# Altium PCB BLE_povodok_hv2.PcbDoc
Units mm, origin at the board's own origin, x right, y up, seen from the top; angles counter-clockwise.
Board outline 35.8 x 35 mm, 2 copper layers (Top Layer, Bottom Layer); 39 components, 29 nets, 124 pads, 174 vias.
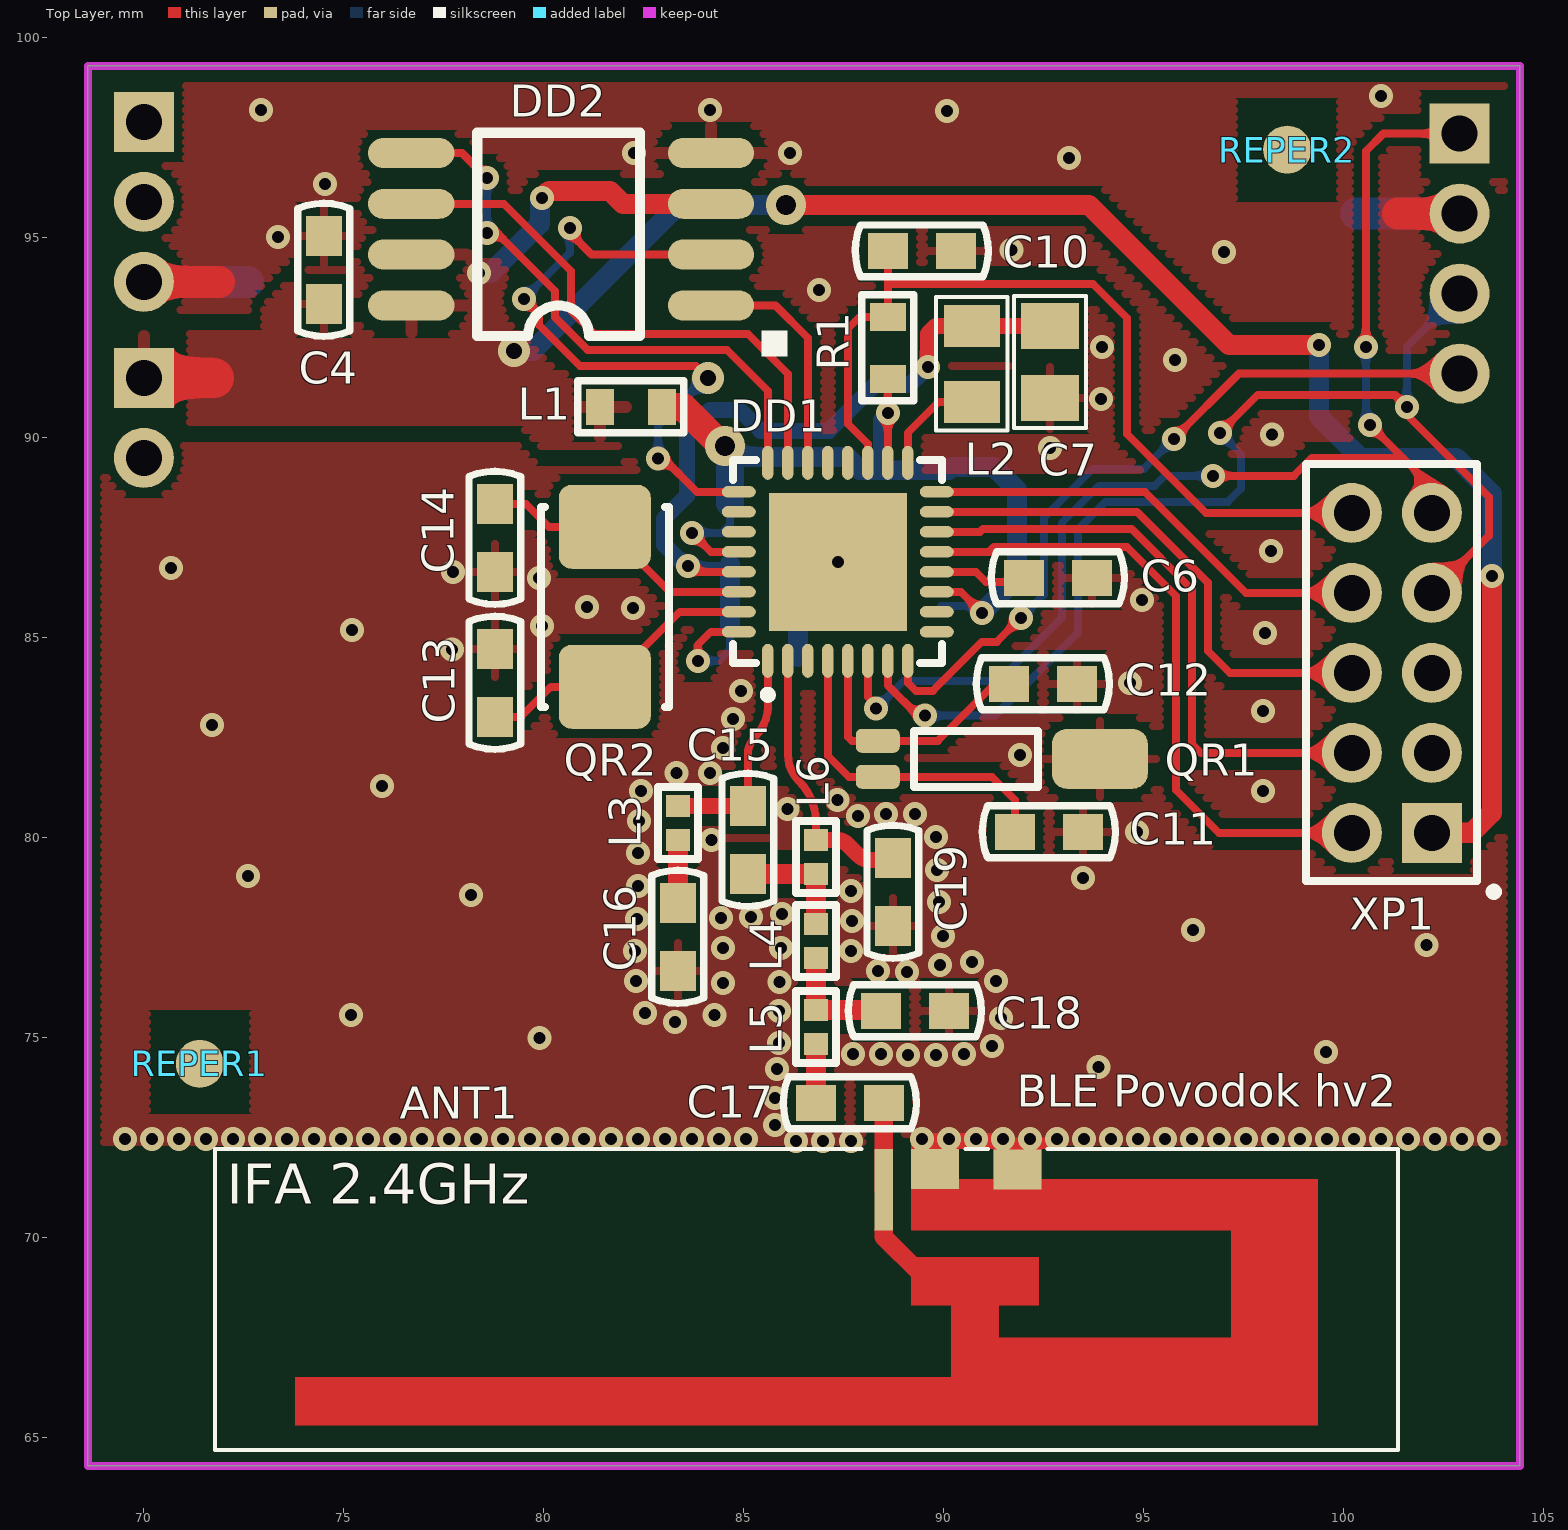
[diagram p0: Top Layer view]
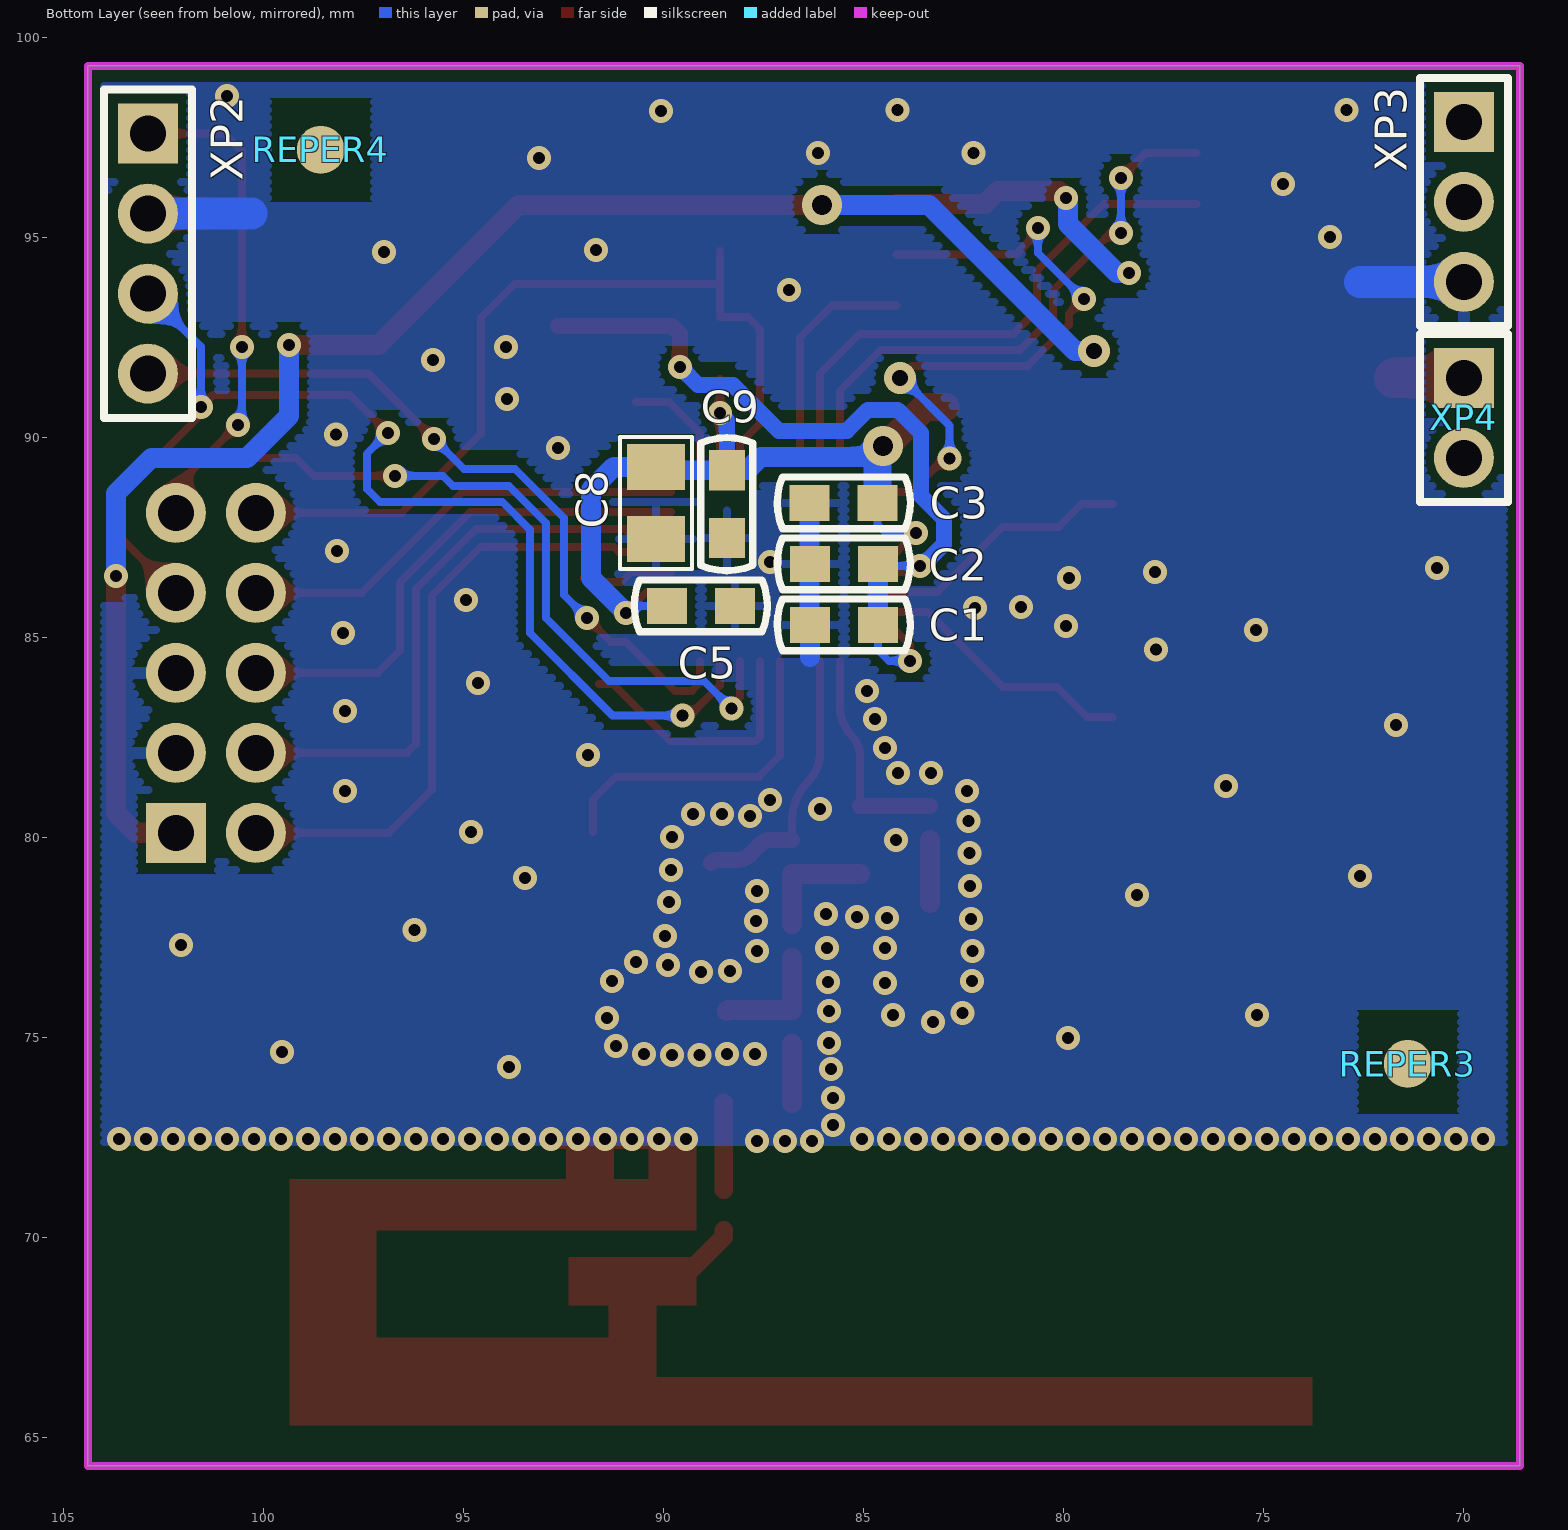
[diagram p1: Bottom Layer view, seen from below]
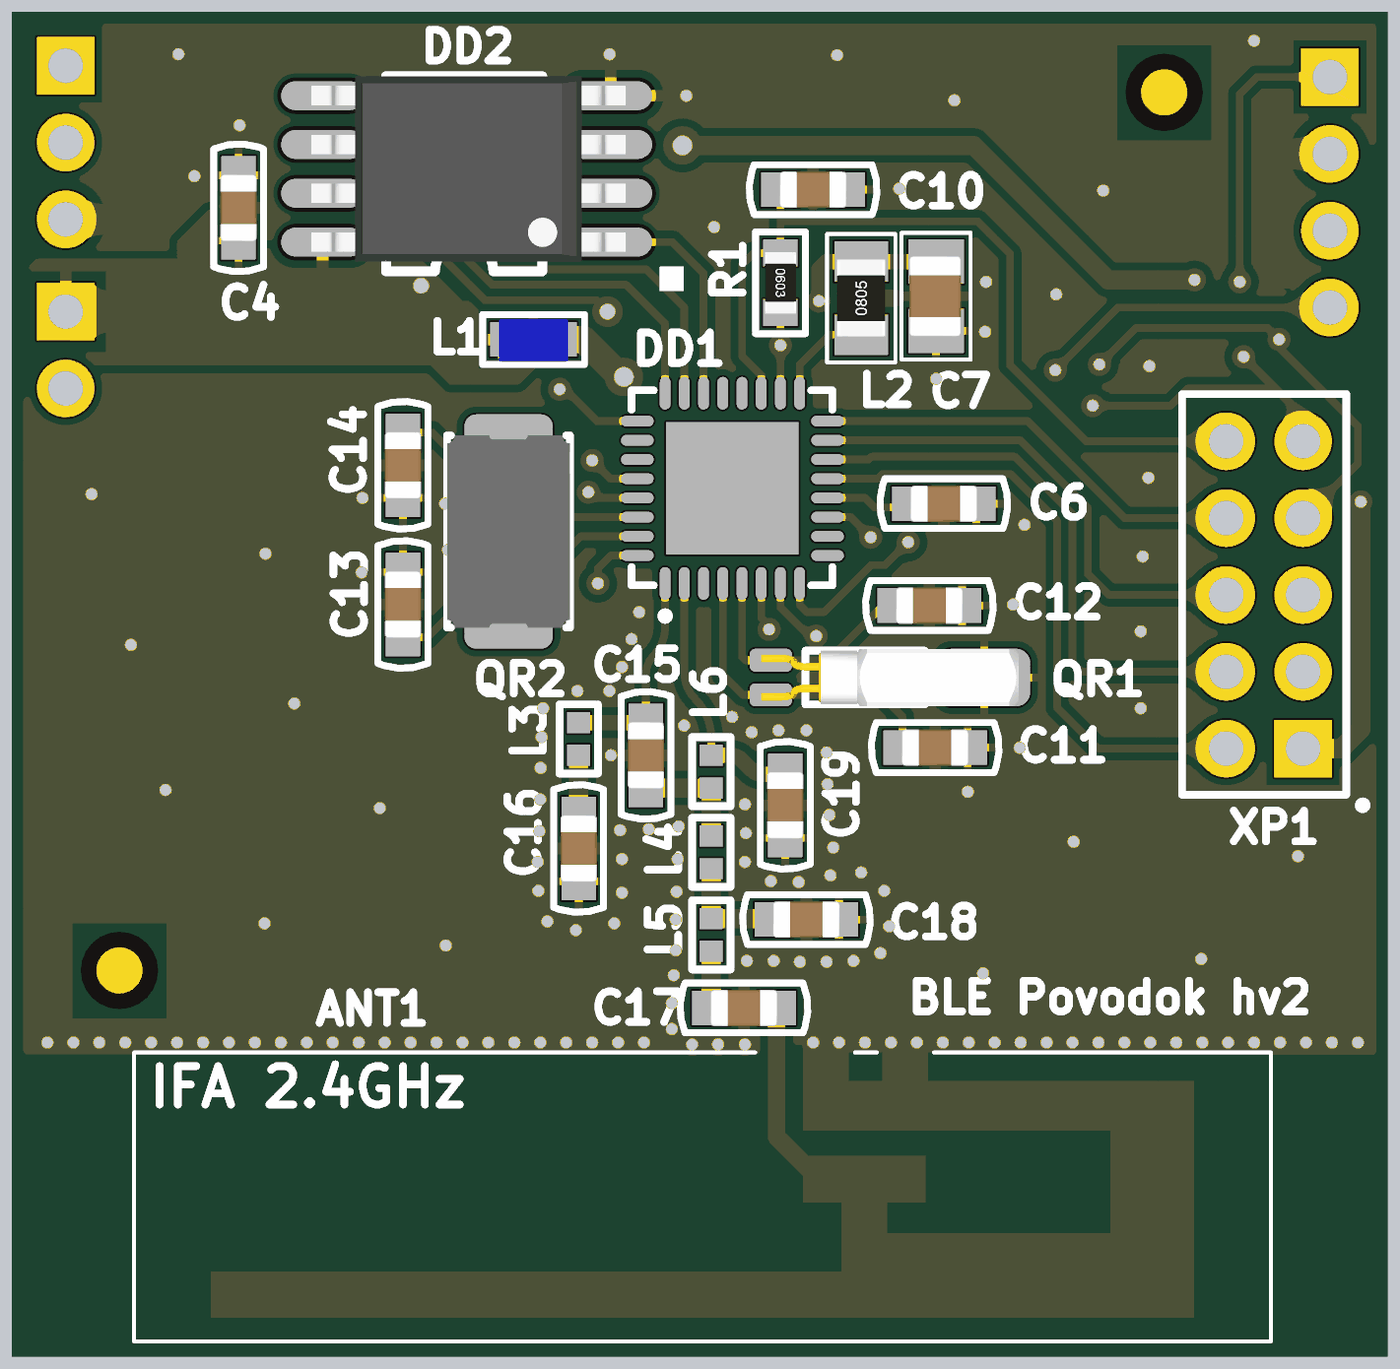
[diagram p2: 3D render of the assembled board from above, using the file's embedded part models]
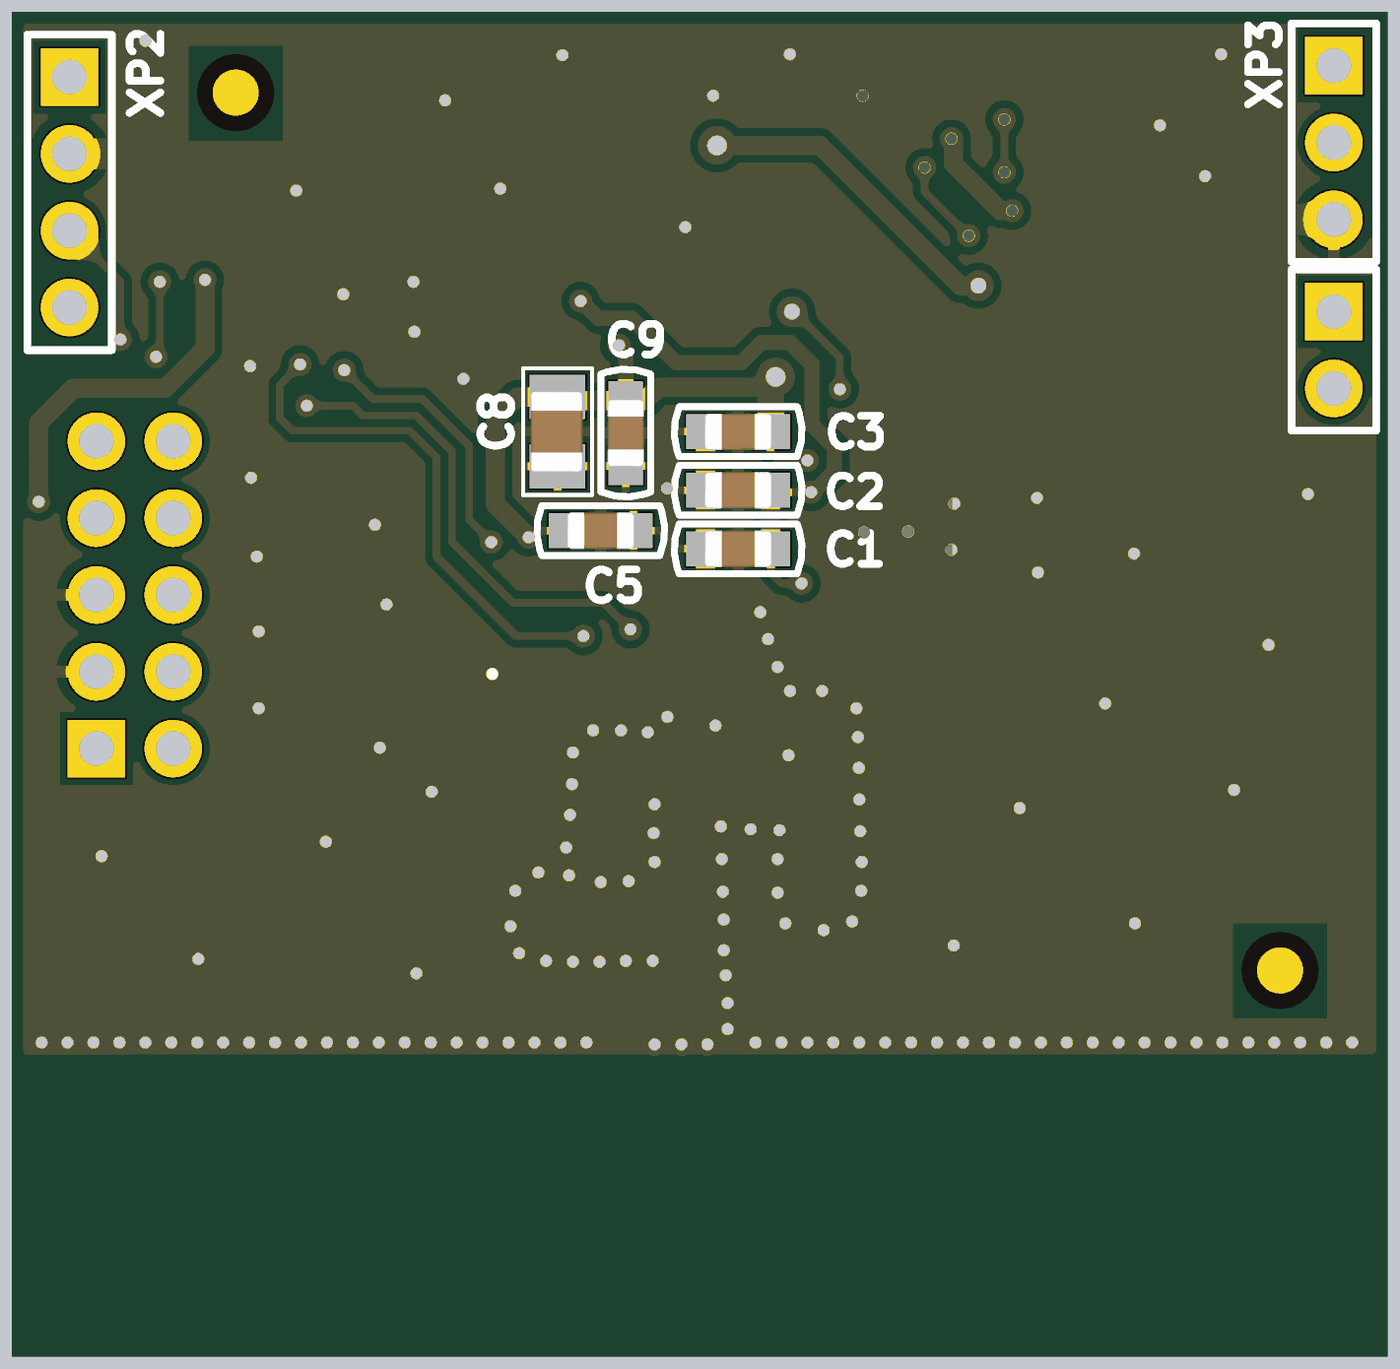
[diagram p3: 3D render of the assembled board from below, using the file's embedded part models]

## Layer stack, top to bottom
Top Solder: solder mask 0.0102, Solder Resist, Dk 3.5
Top Layer: signal copper 0.0356
Dielectric 1: dielectric 0.32, FR-4, Dk 4.8
Bottom Layer: signal copper 0.0356
Bottom Solder: solder mask 0.0102, Solder Resist, Dk 3.5

## Board outline
68.6,64.3 104.4,64.3 104.4,99.3 68.6,99.3

## Design rules (kind name [scope] priority, off if disabled: settings)
Clearance [All] p1: gap=0.2 ignorepadtopadclearanceinfootprint=FALSE
ComponentClearance [All] p1: gap=0.05 collisioncheckmode=3 verticalgap=2540 showdistances=FALSE
HoleSize [All] p1: absolutevalues=TRUE maxlimit=10 minlimit=0.025 maxpercent=80.000 minpercent=20.000
HoleToHoleClearance [All] p1: gap=0.1 allowstackedmicrovias=TRUE
MinimumSolderMaskSliver [All] p1: minsoldermaskwidth=0.05
PolygonConnect POWER [InComponent('XP4') OR InComponent('DD2') OR InComponent('L1')] p1: connectstyle=Relief reliefconductorwidth=0.3 reliefentries=4 polygonreliefangle="90 Angle" airgapwidth=0.3
PolygonConnect VIA [IsVia] p2: connectstyle=Direct reliefconductorwidth=0.254 reliefentries=4 polygonreliefangle="90 Angle" airgapwidth=0.254
PolygonConnect [All] p3: thpad.connectstyle=Relief thpad.reliefconductorwidth=0.3 thpad.reliefentries=4 thpad.polygonreliefangle="90 Angle" thpad.airgapwidth=0.3 smdpad.connectstyle=Relief smdpad.reliefconductorwidth=0.2 smdpad.reliefentries=4 smdpad.polygonreliefangle="90 Angle" smdpad.airgapwidth=0.2 via.connectstyle=Direct via.reliefconductorwidth=0.3 via.reliefentries=4 via.polygonreliefangle="90 Angle" via.airgapwidth=0.3
RoutingVias [All] p1: holewidth=0.4 width=0.4 viastyle="Through Hole" minholewidth=0.3 minwidth=0.6 maxholewidth=0.5 maxwidth=1
ShortCircuit Antenna [InComponent('ANT1')] p1: allowed=TRUE
ShortCircuit [All] p2: allowed=FALSE
SilkToSilkClearance [All] p1: silktosilkclearance=0.05
SilkToSolderMaskClearance [IsPad] p1: minsilkscreentomaskgap=0.05 clearancetoexposedcopper=TRUE
SolderMaskExpansion [All] p1: expansion=0.102
Width [All] p1: maxlimit=1 minlimit=0.2 preferedwidth=0.5
23 further rules are at their usual default settings.

## Classes and differential pairs
component class [3]-MCU: C1 C2 C3 C4 C5 C6 C7 C8 C9 C10 C11 C12 C13 C14 DD1 DD2 L1 L2 QR1 QR2 R1
component class [4]-RF: ANT1 C15 C16 C17 C18 C19 L3 L4 L5 L6 REPER1 REPER2 REPER3 REPER4
component class [5]-CONNECTORS: XP1 XP2 XP3 XP4

## Components (designator, comment, footprint, x,y, rotation, side; value= is the part's Value field where it differs from the comment)
ANT1 "IFA_TI_2.4G_Reference" ANT_IFA_2.4G_BEST 88.497,72.137 r180 top
C1 "0.1uF" CC0603 85.5,85.325 r0 bottom
C2 "0.1uF" CC0603 85.5,86.851 r0 bottom
C3 "0.1uF" CC0603 85.502,88.375 r180 bottom
C4 "0.1uF" CC0603 74.5,94.2 r90 top
C5 "0.1uF" CC0603 89.075,85.8 r0 bottom
C6 "1uF" CC0603 92.85,86.5 r0 top
C7 "10uF" CC0805 92.65,91.9 r90 top
C8 "10uF" CC0805 90.2,88.375 r90 bottom
C9 "0.1uF" CC0603 88.425,88.339 r90 bottom
C10 "0.1uF" CC0603 89.45,94.675 r180 top
C11 "15pF" CC0603 92.625,80.15 r0 top
C12 "15pF" CC0603 92.475,83.85 r0 top
C13 "22pF" CC0603 78.777,83.875 r90 top
C14 "22pF" CC0603 78.775,87.5 r270 top
C15 "1pF" CC0603 85.1,79.95 r270 top
C16 "6.8pF" CC0603 83.35,77.525 r90 top
C17 "12pF" CC0603 87.65,73.375 r0 top
C18 "1pF" CC0603 89.275,75.675 r0 top
C19 "1pF" CC0603 88.725,78.65 r270 top
DD1 "CC2650" QFN32_TI 85.6,84.425 r90 top
DD2 "IS25LP016D-JBLE" EIAJ_SO8 84.18,93.31 r180 top
L1 "BLM18HE152SN1" L0603 82.175,90.775 r0 top
L2 "10uH" RC0805 90.7,91.85 r90 top
L3 "2.4nH" L0402 83.35,80.375 r90 top
L4 "2nH" L0402 86.8,77.425 r270 top
L5 "2nH" L0402 86.8,75.275 r270 top
L6 "2.4nH" L0402 86.8,79.525 r270 top
QR1 "MS3V-T1R" MS3V-T1R 88.35,82.425 r0 top
QR2 "SJK-6L-24.0" AC5032_2 81.525,85.775 r90 top
R1 "100k" RC0603 88.6,92.25 r270 top
REPER1 "REPER1.2" REPER1.2#1 71.4,74.35 r90 top
REPER2 "REPER1.2" REPER1.2#1 98.584,97.206 r90 top
REPER3 "REPER1.2" REPER1.2#2 71.4,74.35 r90 bottom
REPER4 "REPER1.2" REPER1.2#2 98.575,97.2 r90 bottom
XP1 "PLD2-10" PLD2-10 102.175,80.125 r180 top
XP2 "PBS2-04" PLS2-04 102.896,97.6 r270 bottom
XP3 "PBS2-03" PLS2-03 70,97.9 r270 bottom
XP4 "PBS2-02" PLS2-02 70,91.5 r270 bottom

## Footprints (in the part's own frame and the unit in brackets; to place one, negate y for a bottom-side part, rotate by r counter-clockwise, add the part's x,y. Pads: shape width x height; smd on the part's side, far side on the other; paste and mask are expansions set on the pad)
AC5032_2 [mm]
  rrect30% 2.1x2.3 smd mask+0.05: 1(-2,0) 2(2,0)
  silkscreen extent -2.5,-1.6 2.5,1.6, body extent -2.5,-1.6 2.5,1.6, height 1.2
ANT_IFA_2.4G_BEST [mm]
  rect 0.46x2.03 smd paste-10 mask+0.05: 1(-0.003,0.937)
  rect 1.2x1 smd paste-10 mask+0.05: 2(-3.35,0.43) 2(-1.285,0.423)
  Top Layer region: -3.883,2.615 -0.683,2.615 -0.683,3.825 -3.883,3.825
  Top Layer region: -8.683,4.624 -1.684,4.624 -1.684,5.624 -8.683,5.624
  Top Layer region: -10.864,0.662 -0.684,0.662 -0.684,1.952 -10.864,1.952
  Top Layer region: -1.884,-0.078 -0.684,-0.078 -0.684,1.952 -1.884,1.952
  Top Layer region: -3.949,-0.078 -2.749,-0.078 -2.749,1.952 -3.949,1.952
  Top Layer region: -10.864,0.662 -8.683,0.662 -8.683,6.832 -10.864,6.832
  Top Layer region: -10.864,5.623 14.716,5.623 14.716,6.832 -10.864,6.832
  Top Layer region: -2.883,3.825 -1.684,3.825 -1.684,4.625 -2.883,4.625
  Top Layer pour cut-out: -12.914,7.493 -12.914,-0.132 16.769,-0.132 16.769,7.493
  Top Layer lines w0.46: -0.003,1.952 -0.003,2.118 -0.931,3.046
  Bottom Layer pour cut-out: -12.914,7.493 -12.914,-0.132 16.769,-0.132 16.769,7.493
  silkscreen extent -12.86,-0.08 16.72,7.44
CC0603 [mm]
  rect 1x0.9 smd paste-25.4 mask+0.05: 1(-0.85,0) 2(0.85,0)
  silkscreen extent -1.66,-0.65 1.66,0.65, body extent -0.87,-0.47 0.88,0.48, height 0.85
CC0805 [mm]
  rect 1.15x1.45 smd paste-25.4 mask+0.05: 1(-0.9,0) 2(0.9,0)
  silkscreen extent -1.65,-0.9 1.65,0.9, body extent -1.05,-0.65 1.05,0.7, height 1.1
EIAJ_SO8 [mil]
  oval 85x29.53 smd: 1(0,0) 2(0,-50) 3(0,-100) 4(0,-150) 5(295,-150) 6(295,-100) 7(295,-50) 8(295,0)
  silkscreen extent -75,-170 230,50, body extent -15,-170 307,20, height 67
L0402 [mm]
  rect 0.55x0.6 smd mask+0.05: 1(-0.425,0) 2(0.425,0)
  silkscreen extent -0.9,-0.5 0.9,0.5
L0603 [mm]
  rect 0.7x0.9 smd paste-25.4 mask+0.05: 1(-0.775,0) 2(0.774,0)
  silkscreen extent -1.32,-0.65 1.33,0.65, body extent -0.9,-0.58 0.9,0.54, height 1
MS3V-T1R [mm]
  rrect50% 1.1x0.6 smd mask+0.05: 1(0,0) 2(0,-0.9)
  rrect50% 2.4x1.5 smd mask+0.05: 3(5.55,-0.45)
  silkscreen extent 0.9,-1.15 4,0.25, body extent -0.25,-1.19 6.45,0.29, height 1.48
PLD2-10 [mm]
  rect 1.5x1.5 hole 0.9 mask+0.05: 1(-0.025,0)
  round 1.5 hole 0.9 mask+0.05: 2(1.975,0) 3(-0.025,-2) 4(1.975,-2) 5(-0.025,-4) 6(1.975,-4) 7(-0.025,-6) 8(1.975,-6) 9(-0.025,-8) 10(1.975,-8)
  silkscreen extent -1.15,-9.23 3.13,1.2
PLS2-02 [mm]
  rect 1.5x1.5 hole 0.9 mask+0.05: 1(0,0)
  round 1.5 hole 0.9 mask+0.05: 2(2,0)
  silkscreen extent -1.1,-1.1 3.1,1.1
PLS2-03 [mm]
  rect 1.5x1.5 hole 0.9 mask+0.05: 1(0,0)
  round 1.5 hole 0.9 mask+0.05: 2(2,0) 3(4,0)
  silkscreen extent -1.1,-1.1 5.1,1.1
PLS2-04 [mm]
  rect 1.5x1.5 hole 0.9 mask+0.05: 1(-0.006,-0.002)
  round 1.5 hole 0.9 mask+0.05: 2(1.994,-0.002) 3(3.994,-0.002) 4(5.994,-0.002)
  silkscreen extent -1.11,-1.1 7.1,1.1
QFN32_TI [mm]
  oval 0.85x0.28 smd mask+0.05: 1(0,0) 2(0,-0.5) 3(0,-1) 4(0,-1.5) 5(0,-2) 6(0,-2.5) 7(0,-3) 8(0,-3.5) 17(4.95,-3.5) 18(4.95,-3) 19(4.95,-2.5) 20(4.95,-2) 21(4.95,-1.5) 22(4.95,-1) 23(4.95,-0.5) 24(4.95,0)
  oval 0.28x0.85 smd mask+0.05: 9(0.725,-4.225) 10(1.225,-4.225) 11(1.725,-4.225) 12(2.225,-4.225) 13(2.725,-4.225) 14(3.225,-4.225) 15(3.725,-4.225) 16(4.225,-4.225) 25(4.225,0.725) 26(3.725,0.725) 27(3.225,0.725) 28(2.725,0.725) 29(2.225,0.725) 30(1.725,0.725) 31(1.225,0.725) 32(0.725,0.725)
  rect 3.45x3.45 smd mask+0.05: 33(2.475,-1.75)
  silkscreen extent -0.95,-4.35 5.02,0.87
RC0603 [mm]
  rect 0.7x0.9 smd paste-25.4 mask+0.05: 1(-0.775,0) 2(0.774,0)
  silkscreen extent -1.32,-0.65 1.33,0.65, body extent -0.8,-0.4 0.8,0.4, height 0.45
RC0805 [mm]
  rect 1.05x1.4 smd paste-25.4 mask+0.05: 1(-0.95,0) 2(0.95,0)
  silkscreen extent -1.67,-0.89 1.67,0.89, body extent -1,-0.62 1,0.63, height 0.6
REPER1.2#1 [mm]
  round 1.2 smd paste-25.4 mask+0.05: 1(0,0)
  Top Layer pour cut-out: -1.35,-1.325 1.325,-1.325 1.325,1.325 -1.35,1.325
REPER1.2#2 [mm]
  round 1.2 smd paste-25.4 mask-25.4: 1(0,0)
  Top Layer pour cut-out: -1.35,-1.325 1.325,-1.325 1.325,1.325 -1.35,1.325

## Part data
ANT1: library part ANT_WiFi_IFA_BEST
C1 C2 C3 C4 C5 C6 C9 C10 C11 C12 C13 C14 C15 C16 C17 C18 C19: library part CC0603, "CC0603"
C7 C8: library part CC0805, "CC0805"
DD1: library part CC2650RHB, "CC2650RHBT"
DD2: library part S25FL016A0LMFI01, "S25FL016A0LMFI01"
L1: library part L0603, "L0603"
L2: library part L0805, "L0805"
L3 L4 L5 L6: library part L0402, "L0402"
QR1: "CRYSTAL_32768 Hz"
QR2: library part AC5032_2, "AC5032/2"
R1: library part RC0603, "RC0603"
XP2: library part PLS2-04, "PLS2-04"
XP3: library part PLS2-03
XP4: library part PLS2-02

## Via types
v1: diameter 0.6, hole 0.3, Top Layer to Bottom Layer, tented both sides, 170 vias
v2: diameter 1, hole 0.5, Top Layer to Bottom Layer, tented both sides, 2 vias
v3: diameter 0.8, hole 0.4, Top Layer to Bottom Layer, tented both sides, 2 vias

## Nets (pads, with @x,y where several pads share a name; then routed paths per layer and width w, separated by ;. In a path a pad name is that pad's centre, name@x,y a point inside that pad or via, vN(x,y) a via of type N, cw(c..) or ccw(c..) an arc to the next point about the centre after c; other vN are vias at no path point)
+3V: C4.1 DD2.3 DD2.7 DD2.8 L1.1 XP1.1 XP4.1 | length 48.6
  Top Layer w0.5: v1(79.95,96) 80.125,96.175 81.65,96.175 81.975,95.85 DD2.3 ; v2(86.05,95.825) 93.625,95.825 97.125,92.325 v1(99.375,92.325) ; XP1.1 103.2,80.125 103.7,80.625 v1(103.7,86.55)
  Top Layer w1: XP4.1 71.75,91.5
  Bottom Layer w0.5: v1(78.375,94.125) 78.675,94.125 79.9,95.35 79.9,95.95 v1(79.95,96) ; v3(79.25,92.175) 79.725,92.175 83.375,95.825 v2(86.05,95.825) ; v1(99.375,92.325) 99.375,90.539 100.414,89.5 102.809,89.5 103.7,88.609 v1(103.7,86.55)
+3V_F: C3.2 C5.2 C8.2 C9.2 DD1.11 DD1.18 DD1.28 L1.2 R1.2 | length 23.6
  Top Layer w0.2: v1(83.7,87.625) 84.175,87.15 DD1.28 ; DD1.18 R1.2 ; DD1.11 90.425,86.15 v1(90.95,85.625)
  Top Layer w0.7: L1.2 83.475,90.775 84.45,89.8 v2(84.525,89.8)
  Bottom Layer w0.2: v1(83.7,87.625) 84.45,87.625 84.652,87.827 C3.2 ; C5.2 90.775,85.8 v1(90.95,85.625)
  Bottom Layer w0.4: C9.2 88.425,90.45 v1(88.6,90.625)
  Bottom Layer w0.5: v2@84.525,89.725 v2(84.525,89.8) 84.652,89.673 84.8,89.525 87.575,89.525 87.911,89.189 C9.2 90.114,89.189 C8.2 91.25,89.275 91.825,88.7 91.825,86.5 v1(90.95,85.625)
  Bottom Layer w0.7: C3.2 v2@84.652,89.673
BT_MRDO: DD1.8 XP2.4 | length 18.8
  Top Layer w0.2: DD1.8 89.1,83.875 89.3,83.675 89.725,83.675 90.95,84.9 91.325,84.9 v1(91.925,85.5) ; v1(95.75,89.975) 97.381,91.606 XP2.4
  Bottom Layer w0.2: v1(91.925,85.5) 92.5,86.075 92.5,88 93.725,89.225 95,89.225 v1(95.75,89.975)
BT_RX: DD1.7 XP1.7 XP2.3 | length 29.9
  Top Layer w0.2: DD1.7 88.6,83.809 89.355,83.054 v1(89.529,83.054) ; v1(96.9,90.125) 97.85,91.075 101.275,91.075 v1(101.575,90.775) 101.575,90.575 103.625,88.525 103.625,87.55 XP1.7
  Bottom Layer w0.2: v1@89.529,83.104 v1(89.529,83.054) 91.279,83.054 93.35,85.125 93.35,87.709 94.041,88.4 97.1,88.4 97.425,88.725 97.425,89.6 v1(96.9,90.125) ; v1(101.575,90.775) 101.575,92.283 XP2.3
BT_TX: DD1.6 XP1.9 XP2.1 | length 30.7
  Top Layer w0.2: DD1.6 88.1,83.524 88.304,83.32 v1(88.304,83.229) ; v1(96.725,89.05) 98.75,89.05 99.2,89.5 101.475,89.5 ; v1(100.55,92.275) 100.55,97.166 100.99,97.606 XP2.1 ; v1(100.65,90.325) 101.475,89.5 ; XP1.9 102.2,88.775 101.475,89.5
  Bottom Layer w0.2: v1(88.304,83.229) 89,83.925 91.375,83.925 92.95,85.5 92.95,87.875 93.875,88.8 95.275,88.8 95.525,89.05 v1(96.725,89.05) ; v1(100.55,92.275) 100.55,90.425 v1(100.65,90.325)
GND: ANT1.2 C1.2 C2.2 C3.1 C4.2 C5.1 C6.2 C7.1 C8.1 C9.1 C10.1 C11.2 C12.2 C13.2 C14.2 C16.1 C18.2 C19.2 DD1.33 DD2.4 QR1.3 XP1.3 XP1.5 XP2.2 XP3.3 | length 12.5
  Top Layer w0.8: XP3.3 71.875,93.9 ; 101.355,95.606 XP2.2
  Bottom Layer w0.5: 86.35,84.525 C1.2 86.352,85.327 C3.1
  Bottom Layer w0.8: XP3.3 72.6,93.9 ; 100.306,95.606 XP2.2
  other v1: 86.3,72.425 86.975,72.425 87.675,72.425 69.525,72.475 70.2,72.475 70.875,72.475 71.55,72.475 72.225,72.475 72.9,72.475 73.575,72.475 74.25,72.475 74.925,72.475 75.6,72.475 76.275,72.475 76.95,72.475 77.625,72.475 78.3,72.475 78.975,72.475 79.65,72.475 80.325,72.475 81,72.475 81.675,72.475 82.35,72.475 83.025,72.475 83.7,72.475 84.375,72.475 85.05,72.475 89.45,72.475 90.125,72.475 90.8,72.475 91.475,72.475 92.15,72.475 92.825,72.475 93.5,72.475 94.175,72.475 94.85,72.475 95.525,72.475 96.2,72.475 96.875,72.475 97.55,72.475 98.225,72.475 98.9,72.475 99.575,72.475 100.25,72.475 100.925,72.475 101.6,72.475 102.275,72.475 102.95,72.475 103.625,72.475 85.775,72.825 85.775,73.5 85.825,74.225 93.872,74.275 89.106,74.575 89.8,74.575 87.725,74.6 88.425,74.6 90.5,74.6 99.55,74.65 91.2,74.8 85.875,74.875 79.892,75 83.276,75.4 91.425,75.5 75.175,75.575 84.273,75.575 82.534,75.625 85.875,75.675 84.475,76.375 85.897,76.4 82.3,76.425 91.3,76.425 89.075,76.65 88.35,76.675 89.9,76.825 90.7,76.9 82.285,77.175 87.675,77.175 84.475,77.25 85.925,77.25 102.066,77.325 89.975,77.55 96.228,77.7 87.7,77.925 82.325,77.975 84.425,78 85.175,78.025 85.95,78.1 89.875,78.4 78.175,78.575 87.675,78.675 82.35,78.8 93.475,79 72.6,79.05 89.825,79.2 82.36,79.625 84.19,79.95 89.8,80.025 94.825,80.147 82.384,80.425 87.851,80.55 88.55,80.6 89.275,80.6 86.092,80.725 87.342,80.95 82.425,81.175 97.975,81.175 75.95,81.3 83.316,81.625 84.15,81.625 91.9,82.067 84.475,82.25 71.7,82.825 84.725,82.975 97.975,83.175 84.925,83.675 94.65,83.875 77.7,84.71 98.025,85.125 75.2,85.2 79.95,85.3 82.225,85.75 81.075,85.775 94.95,85.95 79.875,86.5 77.725,86.65 70.675,86.75 87.35,86.9 98.175,87.175 92.65,89.75 98.2,90.081 93.925,90.975 95.775,91.95 93.95,92.275 86.875,93.7 96.999,94.65 91.691,94.7 73.35,95.025 74.525,96.35 93.125,97 82.259,97.12 86.15,97.12 90.075,98.175 72.934,98.2 84.155,98.2 100.925,98.55
JTAG_TCK: DD1.14 XP1.4 | length 15
  Top Layer w0.2: DD1.14 90.9,87.65 90.975,87.725 94.691,87.725 96.2,86.216 96.2,82.35 96.425,82.125 XP1.4
JTAG_TDI: DD1.16 XP1.8 | length 11.4
  Top Layer w0.2: DD1.16 95.025,88.65 97.55,86.125 XP1.8
JTAG_TDO: DD1.15 XP1.6 | length 13
  Top Layer w0.2: DD1.15 94.831,88.15 96.6,86.381 96.6,84.675 97.15,84.125 XP1.6
JTAG_TMS: DD1.13 XP1.2 | length 16.2
  Top Layer w0.2: DD1.13 91.125,87.15 91.25,87.275 94.575,87.275 95.8,86.05 95.8,81.2 96.875,80.125 XP1.2
MISO: DD1.25 DD2.2 | length 16.5
  Top Layer w0.2: v1(79.5,93.475) 79.875,93.1 79.875,92.825 80.9,91.8 83.8,91.8 v3(84.1,91.5) ; v1(80.65,95.25) 80.65,95.125 81.195,94.58 DD2.2 ; v1(82.854,89.479) 82.996,89.479 83.825,88.65 DD1.25
  Bottom Layer w0.2: v1(79.5,93.475) 80.65,94.625 v1(80.65,95.25) ; v1(82.854,89.479) 82.858,89.475 82.858,90.308 v3@84,91.45
MOSI: DD1.24 DD2.5 | length 14.4
  Top Layer w0.2: DD2.5 77.955,97.12 v1(78.575,96.5) ; v1(78.575,95.125) 78.825,95.125 80.275,93.675 80.275,93.019 81.094,92.2 84.575,92.2 85.6,91.175 DD1.24
  Bottom Layer w0.2: v1(78.575,95.125) v1(78.575,96.5)
NetANT1_1: ANT1.1 C17.2 | length 2.2
  Top Layer w0.46: ANT1.1 C17.2
NetC1_1: C1.1 C2.1 C7.2 DD1.29 DD1.32 L2.2 | length 22
  Top Layer w0.2: v1(83.6,86.8) 83.75,86.65 DD1.29 ; v1(83.85,84.425) 83.85,84.825 84.175,85.15 DD1.32
  Top Layer w0.4: v1(89.6,91.775) 89.6,92.6 89.8,92.8 L2.2 C7.2
  Bottom Layer w0.2: v1(83.6,86.8) 84.599,86.8 C2.1 ; v1(83.85,84.425) 84.375,84.425 84.65,84.7 C1.1
  Bottom Layer w0.4: v1(83.6,86.8) 83.535,86.8 83,87.335 83,87.975 83.575,88.55 83.575,90.123 84.152,90.7 84.898,90.7 85.423,90.175 87.125,90.175 88.275,91.325 89.15,91.325 v1(89.6,91.775)
  Bottom Layer w0.5: C1.1 C2.1
NetC6_1: C6.1 DD1.12 | length 2.3
  Top Layer w0.2: DD1.12 90.8,86.65 91.05,86.4 91.9,86.4 C6.1
NetC13_1: C13.1 DD1.31 QR2.1 | length 7.2
  Top Layer w0.2: C13.1 79.425,83.025 80.175,83.775 QR2.1 83.4,85.65 DD1.31
NetC14_1: C14.1 DD1.30 QR2.2 | length 7
  Top Layer w0.2: C14.1 79.55,88.35 80.125,87.775 QR2.2 83.15,86.15 DD1.30
NetC15_2: C15.2 L4.1 L6.2 | length 3
  Top Layer w0.5: C15.2 L6.2 L4.1
NetC16_2: C16.2 L3.1 | length 1.6
  Top Layer w0.5: C16.2 L3.1
NetC17_1: C17.1 L5.2 | length 1.5
  Top Layer w0.5: C17.1 L5.2
NetC18_1: C18.1 L4.2 L5.1 | length 2.9
  Top Layer w0.5: L4.2 L5.1 88.4,75.7 C18.1
NetDD1_17: DD1.17 L2.1 | length 2.7
  Top Layer w0.2: DD1.17 89.1,90.125 89.875,90.9 L2.1
RESET: C10.2 DD1.19 R1.1 XP1.10 | length 22
  Top Layer w0.2: DD1.19 88.1,89.85 87.6,90.35 87.6,92.725 87.9,93.025 R1.1 88.6,93.85 ; C10.2 88.6,93.85 ; XP1.10 96.55,88.125 94.575,90.1 94.575,93 93.725,93.85 88.6,93.85
RF_N: C19.1 DD1.2 L6.1 | length 6.9
  Top Layer w0.2: DD1.2 86.1,82.089 ccw(c87.039,82.089) 86.375,81.425 cw(c85.349,80.399) 86.8,80.399 L6.1
  Top Layer w0.4: L6.1 87.298,79.95 cw(c87.298,79.523) 87.6,79.825 87.851,79.574 ccw(c88.15,79.872) 88.15,79.45 88.644,79.45 cw(c88.644,79.194) C19.1@88.825,79.375
RF_P: C15.1 DD1.1 L3.2 | length 5.5
  Top Layer w0.2: C15.1 85.1,82.067 cw(c85.783,82.067) 85.3,82.55 ccw(c84.576,83.274) 85.6,83.274 DD1.1
  Top Layer w0.4: L3.2 C15.1
SCK: DD1.23 DD2.6 | length 14
  Top Layer w0.2: DD2.6 79,95.85 80.675,94.175 80.675,93.184 81.259,92.6 85.1,92.6 86.1,91.6 DD1.23
SS0: DD1.22 DD2.1 | length 5.9
  Top Layer w0.2: DD2.1 85.79,93.31 86.6,92.5 DD1.22
X32K_Q1: C11.1 DD1.4 QR1.2 | length 8.3
  Top Layer w0.2: DD1.4 87.1,82.05 87.625,81.525 QR1.2 91.2,81.525 91.775,80.95 C11.1
X32K_Q2: C12.1 DD1.5 QR1.1 | length 6.6
  Top Layer w0.2: DD1.5 87.6,82.525 87.7,82.425 QR1.1 89.85,82.425 91.275,83.85 C12.1
pads on no net: DD1.3 DD1.9 DD1.10 DD1.20 DD1.21 DD1.26 DD1.27 REPER1.1 REPER2.1 REPER3.1 REPER4.1 XP3.1 XP3.2 XP4.2

## Polygon pours and split planes (outlines as drawn)
GND on Top Layer "GND_L01_P002" (hatched Horizontal grid 0.2 track 0.2, remove dead copper, pour order 2): 68.6,99.3 104.4,99.3 104.4,64.3 68.6,64.3
+3V on Top Layer "+3V_L01_P000" (hatched Horizontal grid 0.2 track 0.2, remove dead copper, pour order 0): 75.7,95.225 75.375,94.9 75.375,94.4 75.025,94.05 73.75,94.05 73,93.3 73,92.775 69.275,92.775 68.6,92.1 68.6,90.575 68.975,90.2 79.525,90.2 80.025,89.7 81.75,89.7 82.2,90.15 82.2,91.275 81.8,91.675 80.3,91.675 79.025,92.95 79.025,94.225 78.025,95.225
GND on Bottom Layer "GND_L02_P004" (hatched Horizontal grid 0.2 track 0.2, remove dead copper, pour order 4): 68.6,99.3 104.4,99.3 104.4,64.3 68.6,64.3

## Keep-outs
Keep-Out Layer:
  the board outline again, w0.2

## Other copper
Top Layer:
  rectangle net GND: 91.246,72.215 92.747,72.507
  rectangle net GND: 89.181,72.215 91.246,72.625
  pour cut-out: 71.728,72.269 68.606,72.269 68.6,72.275 68.6,64.3 104.4,64.3 104.4,72.25
Bottom Layer:
  pour cut-out: 71.728,72.269 68.606,72.269 68.6,72.275 68.6,64.3 104.4,64.3 104.4,72.25

## Silkscreen, mask and mechanical layers (free items; w line width, h text height)
Top Overlay:
  circle w0.254: c103.75,78.65 r0.075
  text "BLE Povodok hv2" at 91.825,73.275 h0.8

## Text inside footprints (layer, text, board x,y; h text height)
ANT1: Top Overlay "IFA 2.4GHz" at 72.075,70.85 h1